# Altium PCB LOAD CONTROL_Final2.PcbDoc (part 2 of 2)
Units mm, origin at the board's own origin, x right, y up, seen from the top; angles counter-clockwise.
Board outline 51.64 x 106.92 mm, 2 copper layers (Top Layer, Bottom Layer); 86 components, 56 nets, 285 pads, 99 vias.
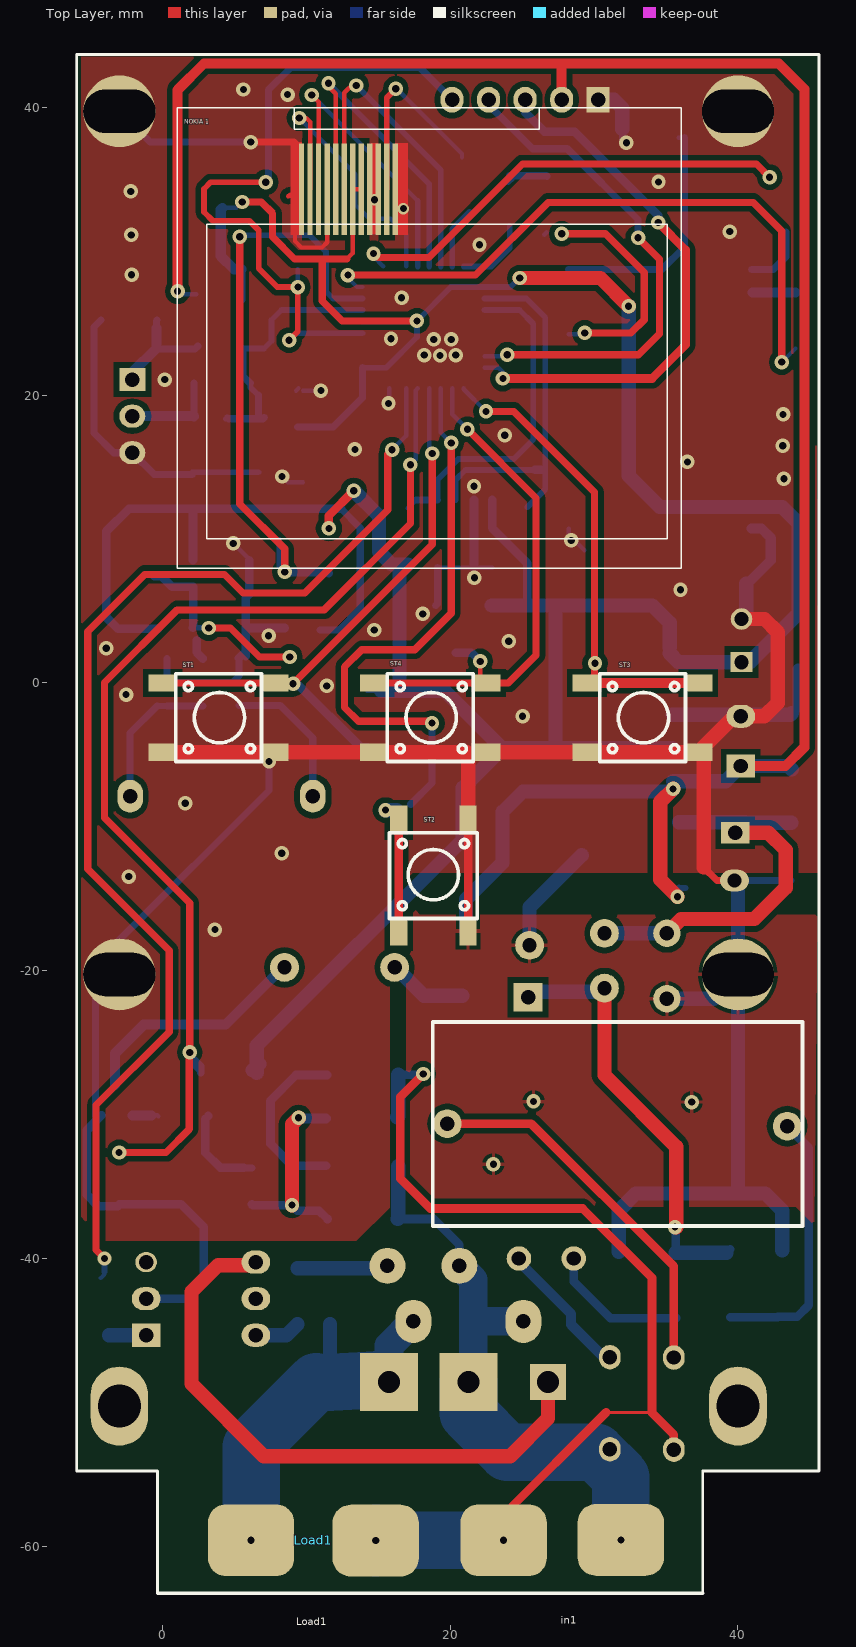
[diagram p0: Top Layer view]

## Via types
v1: diameter 1, hole 0.5, Top Layer to Bottom Layer, tented both sides, 91 vias
v2: diameter 1, hole 0.5, Top Layer to Bottom Layer, 6 vias
v3: diameter 0.8, hole 0.5, Top Layer to Bottom Layer, tented both sides, 2 vias

## Nets (pads, with @x,y where several pads share a name; then routed paths per layer and width w, separated by ;. In a path a pad name is that pad's centre, name@x,y a point inside that pad or via, vN(x,y) a via of type N, cw(c..) or ccw(c..) an arc to the next point about the centre after c; other vN are vias at no path point) (continued)
pads on no net: D1.0 D2.0 D3.0 D4.0 D5.0 D6.0 IC1.2 IC1.3 IC1.20 IC1.21 IC1.22 MOC1.3 MOC1.5 U3.3 U3.4 U3.5 U3.6 U3.7 U3.8 U3.9 U3.10 U3.11 U3.14 U3.15 U3.16 U3.17 U3.18 U3.19 U3.20 U3.23 U3.24 U3.25 U3.26 U3.27 U3.28 U3.29 U3.30 U3.32 U3.33
copper on no net: | length 0.2
  Top Layer w0.3: 8.738,33.833 8.788,33.833 8.89,33.934

## Polygon pours and split planes (outlines as drawn)
GND on Bottom Layer "Top Layer-No Net" (solid, remove dead copper, pour order 212): 45.542,43.663 -5.969,43.663 -5.969,-38.176 -4.902,-39.243 18.644,-39.243 18.644,-39.141 20.345,-37.44 19.761,-36.855 19.761,-15.697 44.145,-15.697 45.466,-14.376
GND on Bottom Layer "Top Layer-No Net" (solid, remove dead copper, pour order 172): 45.441,-37.694 23.952,-37.694 21.285,-35.027 21.285,-19.964 23.825,-17.424 45.441,-17.424
GND on Top Layer "Top Layer-No Net" (solid, remove dead copper, pour order 214): 45.339,43.51 -5.639,43.51 -5.639,-37.109 -3.962,-38.786 13.487,-38.786 15.799,-36.474 15.799,-14.808 17.399,-13.208 45.644,-13.208
GND on Top Layer "Top Layer-No Net" (solid, remove dead copper, pour order 178): 45.314,-37.694 44.044,-36.424 16.967,-36.424 16.967,-16.434 17.602,-15.799 17.907,-16.104 45.542,-16.104

## Other copper
Top Layer:
  rectangle net GND: 14.472,31.166 15.011,37.516
  rectangle net GND: 16.185,31.14 17.087,37.516
  rectangle net GND: 8.903,31.14 9.728,37.592

## Silkscreen, mask and mechanical layers (free items; w line width, h text height)
Top Overlay:
  lines w0.2: -0.33,-63.297 -0.33,-54.788 -5.944,-54.788 -5.944,43.688 45.644,43.688 45.644,-54.762 45.618,-54.788 37.567,-54.788 37.567,-63.297
  lines w0.254: -0.305,-63.271 37.567,-63.271 ; 18.796,-37.744 18.796,-23.571 44.501,-23.571 44.501,-37.744 18.796,-37.744
Bottom Overlay:
  drawing of 3 lines, arcs and shapes, not listed
  text "Serial : AR-L0202" at 34.577,41.642 h0.5
  text "+" at -0.062,37.084 h0.5 r270
  text "Don't Touch" at 21.983,-17.661 h1

## Text inside footprints (layer, text, board x,y; h text height)
Buzzer1: Bottom Overlay "+" at 16.296,-18.771 h0.5